# Altium PCB pcb.PcbDoc
Units mm, origin at the board's own origin, x right, y up, seen from the top; angles counter-clockwise.
Board outline 75.69 x 75.31 mm, 2 copper layers (Top Layer, Bottom Layer); 29 components, 27 nets, 126 pads, 10 vias.
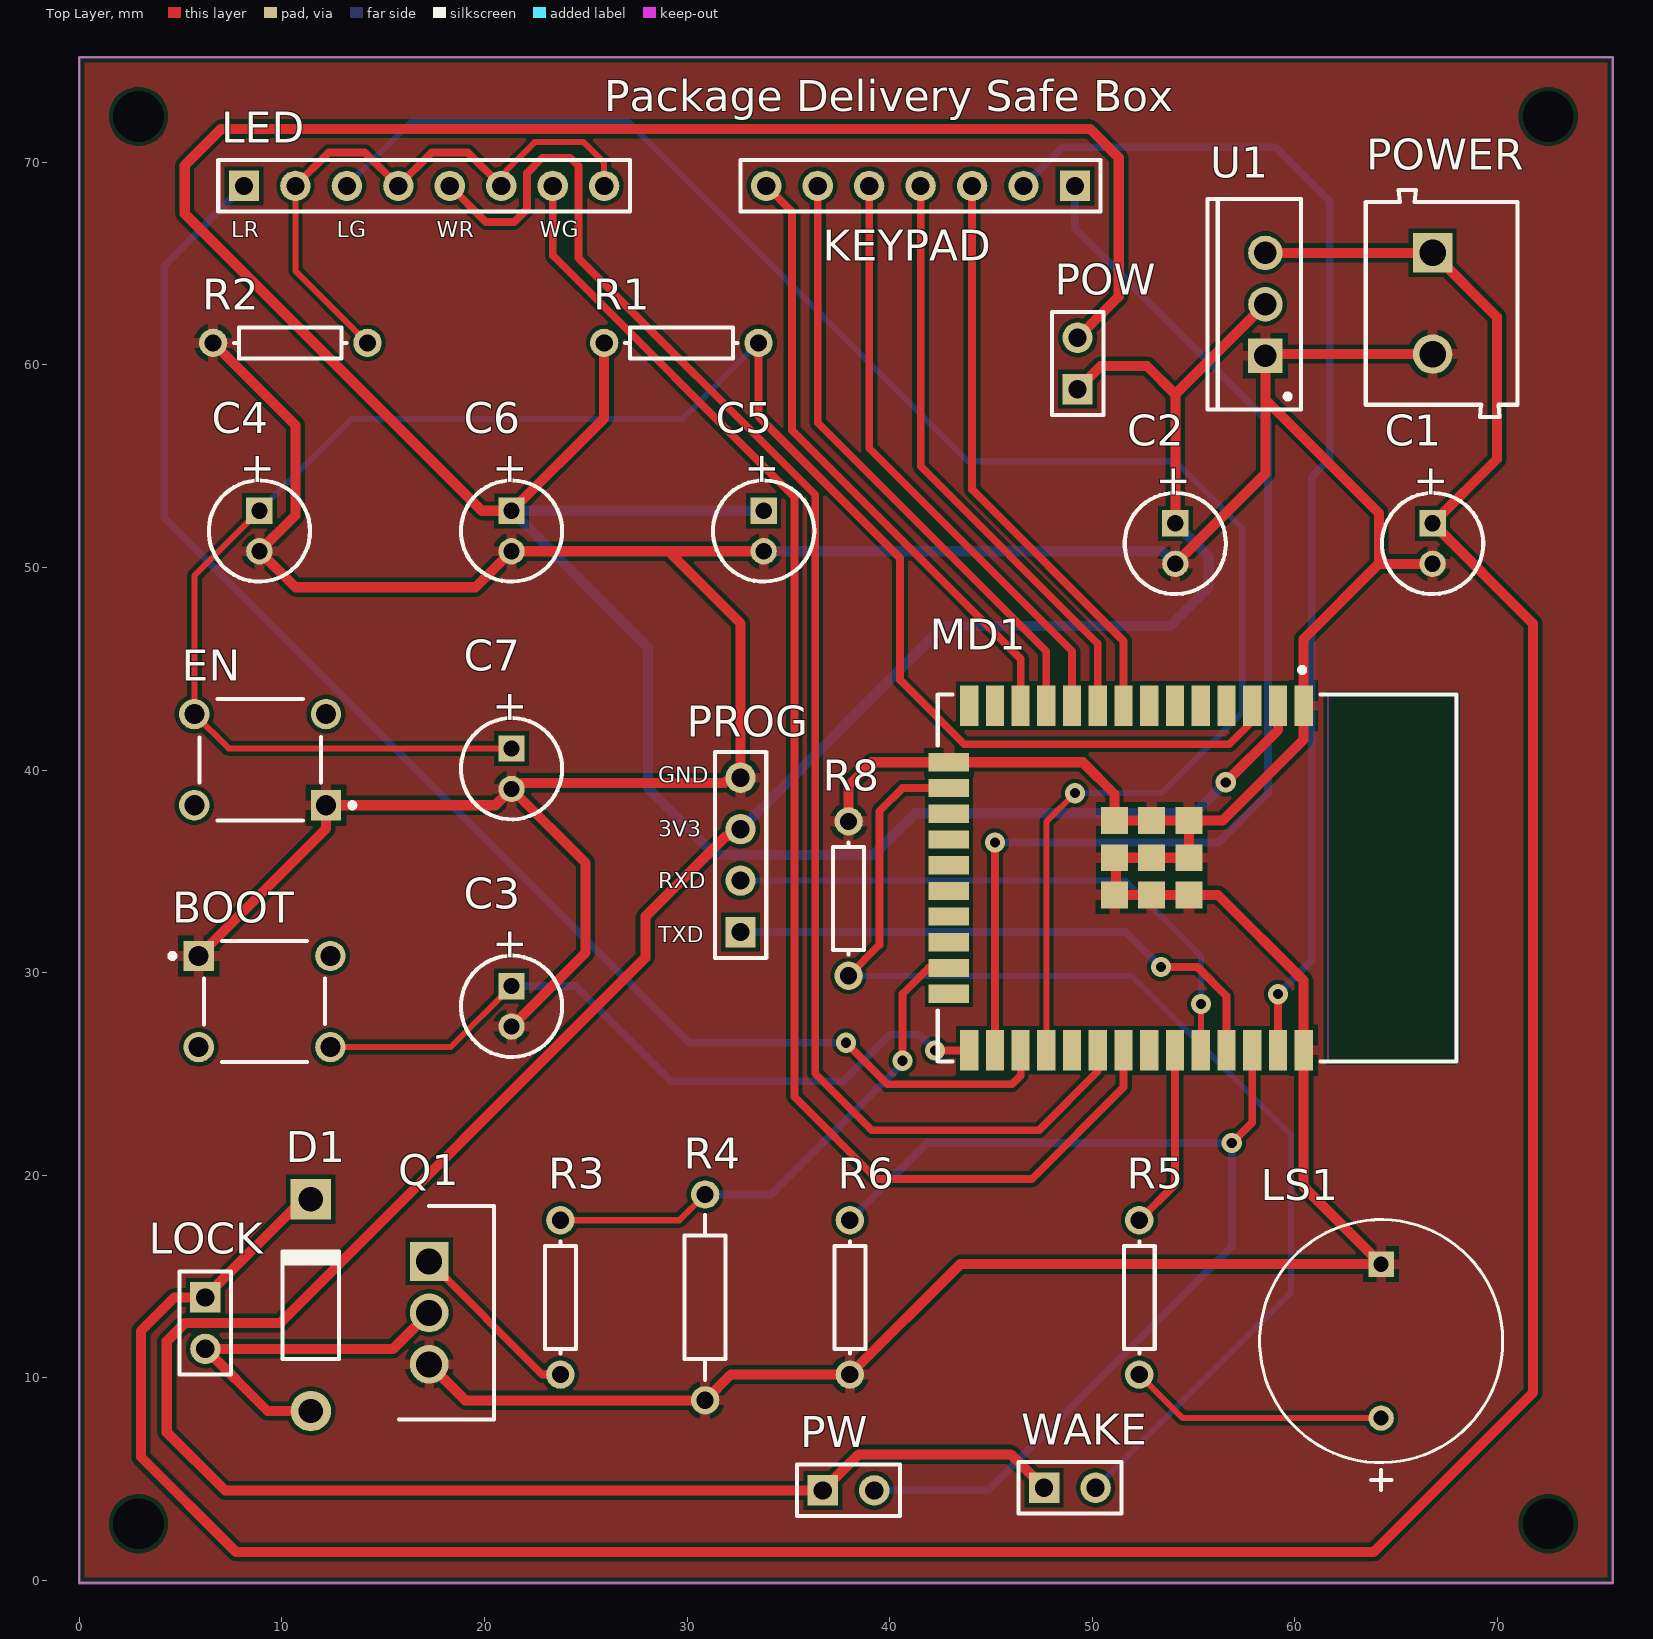
[diagram p0: Top Layer view]
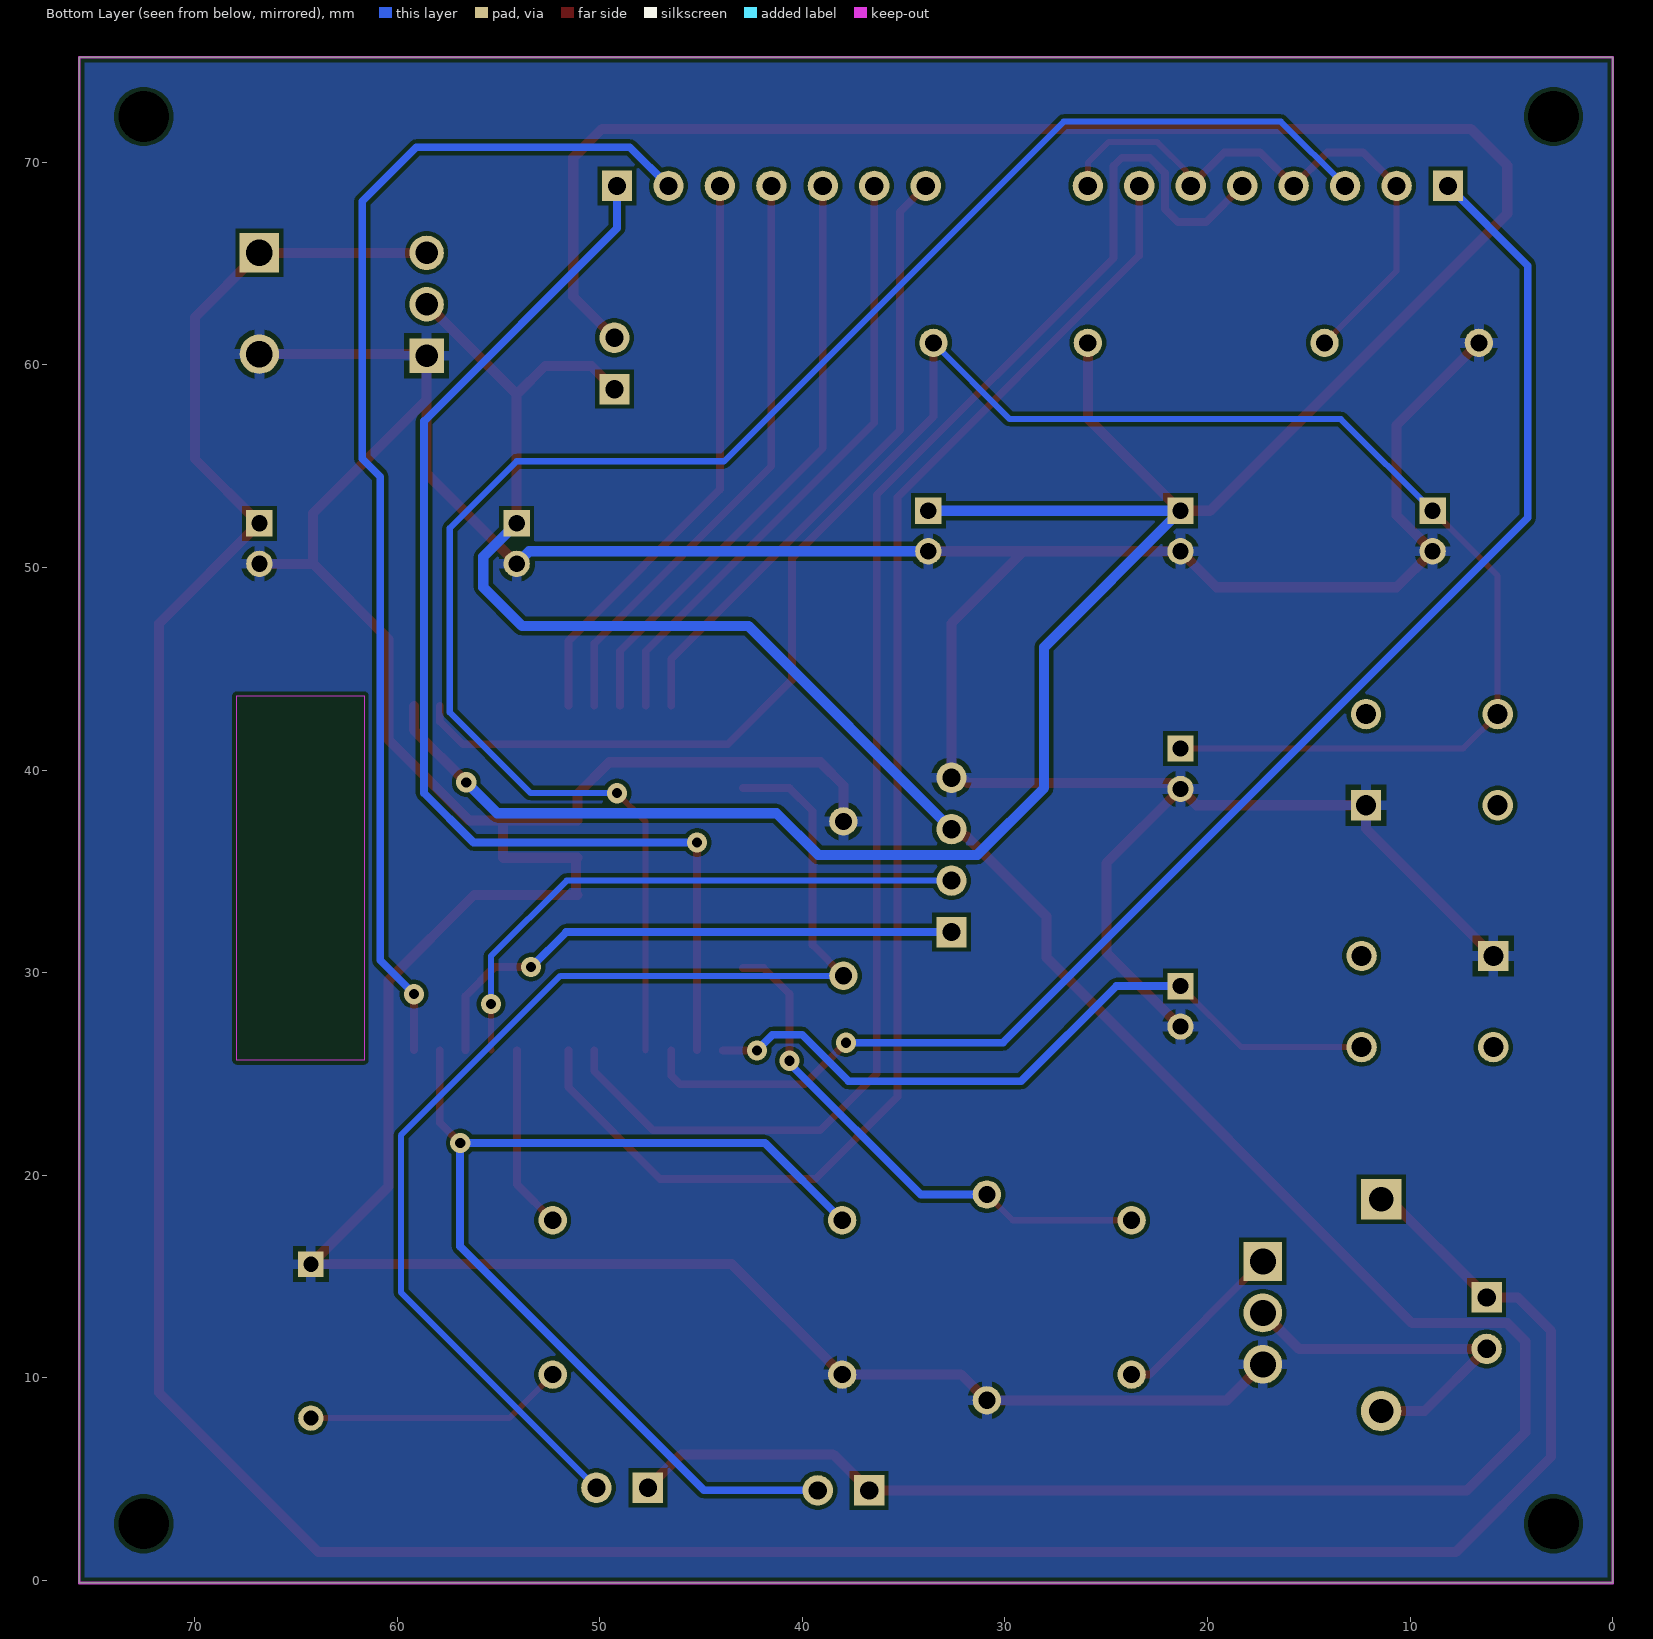
[diagram p1: Bottom Layer view, seen from below]

## Layer stack, top to bottom
Top Solder: solder mask 0.0102, Solder Resist, Dk 3.5
Top Layer: signal copper 0.0356
Dielectric 1: dielectric 0.32, FR-4, Dk 4.8
Bottom Layer: signal copper 0.0356
Bottom Solder: solder mask 0.0102, Solder Resist, Dk 3.5

## Board outline
0,-0.127 75.692,-0.127 75.692,75.184 0,75.184

## Design rules (kind name [scope] priority, off if disabled: settings)
BoardOutlineClearance [All] p1: gap=0.2 ignorepadtopadclearanceinfootprint=FALSE except(0.4: Arc-SplitBarrior Arc-SplitContinuation Track-SplitBarrior Track-SplitContinuation SMDPad-SplitBarrior SMDPad-SplitContinuation THPad-SplitBarrior THPad-SplitContinuation Via-SplitBarrior Via-SplitContinuation Fill-SplitBarrior Fill-SplitContinuation Poly-SplitBarrior Poly-SplitContinuation Region-SplitBarrior Region-SplitContinuation Text-SplitBarrior Text-SplitContinuation)
Clearance "Clearance Bottom Layer" [OnLayer('Bottom Layer')] p1: gap=0.203 ignorepadtopadclearanceinfootprint=TRUE except(0.254: Arc-Text Track-Text SMDPad-Text THPad-Text Via-Text Fill-Text Poly-Text Region-Text Text-Text)
Clearance "Clearance Top Layer" [OnLayer('Top Layer')] p2: gap=0.203 ignorepadtopadclearanceinfootprint=TRUE except(0.254: Arc-Text Track-Text SMDPad-Text THPad-Text Via-Text Fill-Text Poly-Text Region-Text Text-Text)
Clearance [All] p3: gap=0.3 ignorepadtopadclearanceinfootprint=FALSE
HoleSize [All] p1: absolutevalues=TRUE maxlimit=6.3 minlimit=0.2 maxpercent=80.000 minpercent=20.000
MinimumAnnularRing [All] p1: minimumring=0.076
MinimumSolderMaskSliver [All] p1: minsoldermaskwidth=0.1
PolygonConnect PolygonConnect_1 [All] p1: thpad.connectstyle=Relief thpad.reliefconductorwidth=0.508 thpad.reliefentries=4 thpad.polygonreliefangle="90 Angle" thpad.airgapwidth=0.254 smdpad.connectstyle=Relief smdpad.reliefconductorwidth=0.508 smdpad.reliefentries=4 smdpad.polygonreliefangle="90 Angle" smdpad.airgapwidth=0.254 via.connectstyle=Direct via.reliefconductorwidth=0.508 via.reliefentries=4 via.polygonreliefangle="90 Angle" via.airgapwidth=0.254
RoutingCorners [All] p1: cornerstyle=Round minsetback=2.54 maxsetback=2.54
RoutingVias [All] p1: holewidth=0.5 width=1 viastyle="Through Hole" minholewidth=0.2 minwidth=0.45 maxholewidth=1 maxwidth=2
SilkToSilkClearance [All] p1: silktosilkclearance=0.1
SilkToSolderMaskClearance [IsPad] p1: minsilkscreentomaskgap=0.1 clearancetoexposedcopper=TRUE
SolderMaskExpansion [All] p1: expansion=0.102 istentingtop=FALSE
Width [All] p1: maxlimit=2.54 minlimit=0.3 preferedwidth=0.381 minimp=50.000000 maximp=50.000000 favimp=50.000000
25 further rules are at their usual default settings.

## Components (designator, comment, footprint, x,y, rotation, side; value= is the part's Value field where it differs from the comment)
BOOT "1825910-6" TECO-1825910-6_V 9.144,28.575 r0 top
C1 "22uF" CAPPR55-200-1100X500X1200 66.802,51.181 r270 top
C2 "22uF" CAPPR55-200-1100X500X1200 54.102,51.181 r270 top
C3 "0.1uF" CAPPR55-200-1100X500X1200 21.336,28.337 r270 top
C4 "0.1uF" CAPPR55-200-1100X500X1200 8.89,51.8 r270 top
C5 "22uF" CAPPR55-200-1100X500X1200 33.782,51.8 r270 top
C6 "0.1uF" CAPPR55-200-1100X500X1200 21.336,51.8 r270 top
C7 "1uF" CAPPR55-200-1100X500X1200 21.336,40.069 r270 top
D1 "Diode 1N4002" DO-41 11.43,13.589 r90 top
EN "1825910-6" TECO-1825910-6_V 8.927,40.513 r180 top
KEYPAD "Keypad" HDR1X7 49.149,68.834 r180 top
LED "LEDs" HDR1X8 8.128,68.834 r0 top
LOCK "LOCK" HDR1X2 6.223,13.97 r270 top
LS1 "Buzzer" FP-MCKPX-G1203A-K4056-MFG 64.262,11.811 r270 top
MD1 "ESP32-WROOM-32D" FP-ESP32-WROOM-32D-MFG 55.176,34.671 r270 top
POW "Power enable" HDR1X2 49.276,58.801 r90 top
POWER "Power in" 691102710002 67.252,63.032 r270 top
PROG "FTDI" HDR1X4 32.639,32.004 r90 top
PW "PW reset button" HDR1X2 36.703,4.445 r0 top
Q1 "IRL520NPBF" TO254P469X1042X1967-3P 17.272,15.748 r270 top
R1 "" AXIAL-0.3 29.718,61.087 r180 top value=10k
R2 "330" AXIAL-0.3 10.414,61.087 r180 top
R3 "" AXIAL-0.3 23.749,13.97 r90 top value=220
R4 "Res2" AXIAL-0.4 30.893,13.97 r90 top value=100k
R5 "" AXIAL-0.3 52.324,13.97 r270 top value=220
R6 "" AXIAL-0.3 38.036,13.97 r270 top value=10k
R8 "" AXIAL-0.3 37.973,33.655 r90 top value=10k
U1 "LD1117V33C" TO220 58.547,62.992 r90 top
WAKE "Sleep wake up button" HDR1X2 47.625,4.572 r0 top

## Footprints (in the part's own frame and the unit in brackets; to place one, negate y for a bottom-side part, rotate by r counter-clockwise, add the part's x,y. Pads: shape width x height; smd on the part's side, far side on the other; paste and mask are expansions set on the pad)
691102710002 [mm] "5,00mm - modular - blue - Horizontal entry with pressure clamp - 9,9 mm height - 02p"
  rect 1.95x1.95 hole 1.3: 1(-2.5,-0.45)
  round 1.95 hole 1.3: 2(2.5,-0.45)
  silkscreen extent -5.6,-3.75 5.6,3.75, body extent -5.6,-3.75 5.6,3.75, height 9.96
AXIAL-0.3 [mm] "Axial Device, Thru-Hole; 2 Leads; 0.3 in Pin Spacing"
  round 1.4 hole 0.85: 1(-3.81,0) 2(3.81,0)
  silkscreen extent -2.77,-0.76 2.77,0.76
AXIAL-0.4 [mm] "Axial Device, Thru-Hole; 2 Leads; 0.4 in Pin Spacing"
  round 1.4 hole 0.85: 1(-5.08,0) 2(5.08,0)
  silkscreen extent -4.06,-1.02 4.06,1.02
CAPPR55-200-1100X500X1200 [mm] "THD, 2-Leads, Dia 5mm, Body Length 11mm"
  rect 1.3x1.3 hole 0.8: 1(-1,0)
  round 1.3 hole 0.8: 2(1,0)
  silkscreen extent -2.5,-2.5 2.5,2.5, body extent -2.5,-2.5 2.5,2.5, height 12
DO-41 [mm] "Diode, Axial; Body 5.2 x 2.7 mm (LxDia. max), Lead Dia. 0.86 mm (max)"
  round 2 hole 1.2: 1(-5.23,0)
  rect 2x2 hole 1.2: 2(5.23,0)
  silkscreen extent -2.65,-1.4 2.75,1.4
FP-ESP32-WROOM-32D-MFG [mm]
  rect 2x0.9 smd paste+0 mask+0: 1(-8.5,5.26) 2(-8.5,3.99) 3(-8.5,2.72) 4(-8.5,1.45) 5(-8.5,0.18) 6(-8.5,-1.09) 7(-8.5,-2.36) 8(-8.5,-3.63) 9(-8.5,-4.9) 10(-8.5,-6.17) 11(-8.5,-7.44) 12(-8.5,-8.71) 13(-8.5,-9.98) 14(-8.5,-11.25) 25(8.5,-11.25) 26(8.5,-9.98) 27(8.5,-8.71) 28(8.5,-7.44) 29(8.5,-6.17) 30(8.5,-4.9) 31(8.5,-3.63) 32(8.5,-2.36) 33(8.5,-1.09) 34(8.5,0.18) 35(8.5,1.45) 36(8.5,2.72) 37(8.5,3.99) 38(8.5,5.26)
  rect 0.9x2 smd paste+0 mask+0: 15(-5.715,-12.25) 16(-4.445,-12.25) 17(-3.175,-12.25) 18(-1.905,-12.25) 19(-0.635,-12.25) 20(0.635,-12.25) 21(1.905,-12.25) 22(3.175,-12.25) 23(4.445,-12.25) 24(5.715,-12.25)
  rect 1.33x1.33 smd paste+0 mask+0: 39(-2.835,-0.405) 39(-2.835,-2.24) 39(-2.835,-4.075) 39(-1,-0.405) 39(-1,-2.24) 39(-1,-4.075) 39(0.835,-0.405) 39(0.835,-2.24) 39(0.835,-4.075)
  Keep-Out Layer region: -9,6.45 9,6.45 9,12.75 -9,12.75
  Keep-Out Layer region: -9,6.45 9,6.45 9,12.75 -9,12.75
  silkscreen extent -10.4,-12.8 9.05,12.8, body extent -9.6,-13.35 9.6,12.9, height 0.25
FP-MCKPX-G1203A-K4056-MFG [mm]
  rect 1.25x1.25 hole 0.75 paste-1000 mask+0: 1(-3.8,0)
  round 1.25 hole 0.75 paste-1000 mask+0: 2(3.8,0)
  silkscreen extent -6,-6 7.35,6, body extent -6.1,-6.1 6.1,6.1, height 0.25
HDR1X2 [mm] "Connector; Header; 2 Position"
  rect 1.5x1.5 hole 0.9: 1(0,0)
  round 1.5 hole 0.9: 2(2.54,0)
  silkscreen extent -1.27,-1.27 3.81,1.27
HDR1X4 [mm] "Connector; Header; 4 Position"
  rect 1.5x1.5 hole 0.9: 1(0,0)
  round 1.5 hole 0.9: 2(2.54,0) 3(5.08,0) 4(7.62,0)
  silkscreen extent -1.27,-1.27 8.89,1.27
HDR1X7 [mm] "Connector; Header; 7 Position"
  rect 1.5x1.5 hole 0.9: 1(0,0)
  round 1.5 hole 0.9: 2(2.54,0) 3(5.08,0) 4(7.62,0) 5(10.16,0) 6(12.7,0) 7(15.24,0)
  silkscreen extent -1.27,-1.27 16.51,1.27
HDR1X8 [mm] "Connector; Header; 8 Position"
  rect 1.5x1.5 hole 0.9: 1(0,0)
  round 1.5 hole 0.9: 2(2.54,0) 3(5.08,0) 4(7.62,0) 5(10.16,0) 6(12.7,0) 7(15.24,0) 8(17.78,0)
  silkscreen extent -1.27,-1.27 19.05,1.27
TECO-1825910-6_V [mm] "Switch, 4-Leads, Body 5.99x5.99mm"
  rect 1.5x1.5 hole 0.99: 1(-3.25,2.25)
  round 1.5 hole 0.99: 2(3.25,2.25) 3(-3.25,-2.25) 4(3.25,-2.25)
  silkscreen extent -4.67,-3 3,3, body extent -3,-2.99 2.99,3, height 5
TO220 [mm] "TO, Thru-Hole, Vertical, Heatsink Mounted; 3 In-Line Leads; Pitch 2.54 mm"
  rect 1.7x1.7 hole 1.1: 1(-2.54,0)
  round 1.7 hole 1.1: 2(0,0) 3(2.54,0)
  silkscreen extent -5.2,-1.75 5.2,2.85, body extent -5.25,-1.8 5.25,2.9, height 19.7
TO254P469X1042X1967-3P [mm]
  rect 1.92x1.92 hole 1.28: 1(0,0)
  round 1.92 hole 1.28: 2(2.54,0) 3(5.08,0)
  silkscreen extent -2.73,-1.49 7.81,3.2, body extent -2.67,-1.5 7.75,3.19, height 18.84

## Part data
BOOT EN: library part CMP-1684-00021-1, "Tact Switch, SPST-NO, 0.05 A, -35 to 85 degC, 4-Pin THD, RoHS, Bulk", Actuator Color=Black, Contact Rating @ Voltage=0.05A@24VDC, Dielectric Strength=500VAC, Manufacturer="TE Connectivity", Maximum AC Voltage Rating=N/A, Maximum Contact Resistance=100mOhm, Maximum DC Voltage Rating=24V, Minimum Insulation Resistance=100MOhm, Operating Temperature=-35to85C, Package Description="4-Pin Through Hole Device, Body 5.99 x 5.99 mm, Pitch 6.5 mm", Package Reference=THD, Actuator Length=1.4mm, Actuator Material=PolybutyleneTerephthalate, Actuator Style=RoundButton, Base Material=N/A, Body Orientation=Straight, Bushing Type=Unthreaded, Contact Material=CopperAlloy, Contact Plating=Silver, Datasheet URL=http://www.te.com/commerce/DocumentDelivery/DDEController?Action=showdoc&DocId=Customer+Drawing%7F1825910%7FC9%7Fpdf%7FEnglish%7FENG_CD_1825910_C9.pdf%7F1825910-6, Datasheet Version="Rev. C9", Dimension=5.99x5mm, Electrical Life=100000Cycles, Family=1825910, Function=MomentaryContact, Housing Material=N/A, Illumination=N/R, Manufacturer URL=http://www.te.com, Mechanical Life=100000Cycles, Mounting=ThroughHole, Packaging=N/A, Part No=1825910-6, Pole Throw Configuration=SPST, Product Weight=N/A, RoHS=Yes, Seal Description=N/A, Seal Location=N/A, Switch Configuration=OFF(ON), Terminal Type=PCPins, Thread Size=N/R
C1 C2 C5: library part CMP-1665-00036-2, "Aluminum Electrolytic Capacitor, 22 uF, +/- 20%, 50 V, -40 to 85 degC, 2-Pin THD, RoHS, Bulk", Case/Package=Radial, Leakage Current=3uA, Manufacturer=Panasonic, Max Operating Temperature=85degC, Min Operating Temperature=-40degC, Package Description="2-Pin Radial Lead, Dia 5 mm, Height 12 mm", Package Quantity=200, Package Reference=CAPPR55-200-1100X500X1200, Ripple Current=100mA, Tolerance=20%, Voltage=50V, Capacitance=22uF, Datasheet URL=https://industrial.panasonic.com/cdbs/www-data/pdf/RDF0000/ABA0000C1218.pdf, Datasheet Version="Rev. 05, 10/2016", Diameter=5mm, Dissipation Factor=0.12%, Height=11mm, Height - Seated (Max)=0.472inch, Lead Diameter=0.5mm, Lead Pitch=2mm, Lead/Base Style=Straight, Length=11mm, Life (Hours)=2000Hour, Manufacturer URL=http://www.panasonic.com/, Mount=ThroughHole, Packaging=Bulk, Radiation Hardening=No, REACH SVHC=NoSVHC, Ripple Current (AC)=100mA, RoHSCompliant=true, Termination=Radial, Voltage Rating=50V, Voltage Rating (DC)=50V
C3 C4 C6 C7: library part CMP-1665-00036-2, "Aluminum Electrolytic Capacitor, 22 uF, +/- 20%, 50 V, -40 to 85 degC, 2-Pin THD, RoHS, Bulk", Capacitance=22uF, Case/Package=Radial, Leakage Current=3uA, Manufacturer=Panasonic, Max Operating Temperature=85degC, Min Operating Temperature=-40degC, Package Description="2-Pin Radial Lead, Dia 5 mm, Height 12 mm", Package Quantity=200, Package Reference=CAPPR55-200-1100X500X1200, Ripple Current=100mA, Tolerance=20%, Voltage=50V, Datasheet URL=https://industrial.panasonic.com/cdbs/www-data/pdf/RDF0000/ABA0000C1218.pdf, Datasheet Version="Rev. 05, 10/2016", Diameter=5mm, Dissipation Factor=0.12%, Height=11mm, Height - Seated (Max)=0.472inch, Lead Diameter=0.5mm, Lead Pitch=2mm, Lead/Base Style=Straight, Length=11mm, Life (Hours)=2000Hour, Manufacturer URL=http://www.panasonic.com/, Mount=ThroughHole, Packaging=Bulk, Radiation Hardening=No, REACH SVHC=NoSVHC, Ripple Current (AC)=100mA, RoHSCompliant=true, Termination=Radial, Voltage Rating=50V, Voltage Rating (DC)=50V
D1: "1 Amp General Purpose Rectifier", Code_JEDEC=DO-204-AL, ComponentLink1Description="Manufacturer Link", ComponentLink1URL=http://www.fairchildsemi.com/, ComponentLink2Description=Datasheet, ComponentLink2URL=http://www.fairchildsemi.com/ds/1N%2F1N4001.pdf, DatasheetVersion=1998, LatestRevisionDate=17-Jul-2002, LatestRevisionNote="Re-released for DXP Platform.", PackageDescription="Diode, Axial; Body 5.2 x 2.7 mm (LxDia. max), Lead Dia. 0.86 mm (max)", PackageReference=DO-41, PackageVersion=Aug-1999, Published=8-Jun-2000, Publisher="Altium Limited"
KEYPAD: library part "Header 7", "Header, 7-Pin", LatestRevisionDate=17-Jul-2002, LatestRevisionNote="Re-released for DXP Platform.", Publisher="Altium Limited"
LED: library part "Header 8", "Header, 8-Pin", LatestRevisionDate=17-Jul-2002, LatestRevisionNote="Re-released for DXP Platform.", Publisher="Altium Limited"
LOCK POW PW WAKE: library part "Header 2", "Header, 2-Pin", LatestRevisionDate=17-Jul-2002, LatestRevisionNote="Re-released for DXP Platform.", Publisher="Altium Limited"
LS1: library part CMP-12433-000001-1, "MAGNETIC BUZZER AND TRANSDUCER - More Details", Current=30mA, Frequency=2300Hz, Manufacturer="Multicomp Pro", Manufacturer Part Number=MCKPX-G1203A-K4056, Max Supply Voltage=5V, Min Supply Voltage=2V, Operating Supply Voltage=3V, Package=0, Temperature="-20°C to +70°C", Temperature Range High=+70°C, Temperature Range Low=-20°C, Automotive=No, Category=Speak, ComponentLink2Description=Datasheet, ComponentLink2URL=http://www.farnell.com/datasheets/1498149.pdf?_ga=2.17855225.1157923166.1572356775-536200964.1569240579, Device Class L1=Electromechanical, Device Class L2="Audio Products", Device Class L3=Buzzers, Height=9.5mm, Lead Free=Yes, Octopart=https://octopart.com/mckpx-g1203a-k4056-multicomp-12157154, RoHS=TRUE, Standoff Height=0.5mm
MD1: library part CMP-194065-000003-1, "WIFI MODULE 32MBITS SPI FLASH", Manufacturer="Espressif Systems", Max Frequency=2484MHz, Max Supply Voltage=3.6V, Min Supply Voltage=3V, Nominal Supply Current=500mA, Temperature="-40°C to +85°C", Temperature Range High=+85°C, Temperature Range Low=-40°C, Automotive=No, Bandwidth=72MHz, Category=UNK, ComponentLink2Description=Datasheet, ComponentLink2URL=https://www.espressif.com/sites/default/files/documentation/esp32-wroom-32d_esp32-wroom-32u_datasheet_en.pdf, Data Rate=150Mbits/s, Device Class L1="Integrated Circuits (ICs)", Device Class L2="RF Semiconductors and Devices", Device Class L3=Transceivers, Digikey Description="WIFI MODULE 32MBITS SPI FLASH", Height=3.2mm, Interface=I2C,SPI,UART,Ethernet,I2S,Other, Lead Free=Yes, Manufacturer Part Number=ESP32-WROOM-32D, Mouser Description="Wi-Fi/BT BLE Module ESP32-D0WD, SPI Flash, UART, P", Number Of Adc Channels=16, Number Of Gpio=32, Octopart=https://octopart.com/esp32-wroom-32d-espressif+systems-91040050, Package=ESP32-WROOM-32D, RoHS=TRUE, Sensitivity=-98dBm
POWER: library part CMP-1502-03258-1, "Series 102 - 5.00 mm Horizontal Entry Modular with Pressure Clamp WR-TBL, 2 pin", Manufacturer="Wurth Elektronik", Operating Temperature=-40to105degC, Package Reference=691102710002, Datasheet URL=http://katalog.we-online.de/em/datasheet/6911027100xx.pdf, Manufacturer URL=http://www.we-online.de, Mounting Technology=THT, Packaging=Box, Part Number=691102710002, Pin Number=2, Pitch=5.00mm, Publisher=WurthElektronik
PROG: library part "Header 4", "Header, 4-Pin", LatestRevisionDate=17-Jul-2002, LatestRevisionNote="Re-released for DXP Platform.", Publisher="Altium Limited"
Q1: "MOSFET (N-Channel)", Manufacturer_Name=Infineon, Mouser Part Number=942-IRL520NPBF, Arrow Part Number=IRL520NPBF, Arrow Price/Stock=https://www.arrow.com/en/products/irl520npbf/infineon-technologies-ag?region=nac, Datasheet Link=https://www.infineon.com/dgdl/irl520npbf.pdf?fileId=5546d462533600a40153565f9b62255b, Height=4.69mm, Manufacturer_Part_Number=IRL520NPBF, Mouser Price/Stock=https://www.mouser.co.uk/ProductDetail/Infineon-Technologies/IRL520NPBF?qs=9%252BKlkBgLFf3eZ5ppEpIaKQ%3D%3D
R1 R2 R3 R5 R6 R8: library part Res1, "Resistor", LatestRevisionDate=17-Jul-2002, LatestRevisionNote="Re-released for DXP Platform.", PackageDescription="Axial Device, Thru-Hole; 2 Leads; 0.3 in Pin Spacing", PackageReference=AXIAL-0.3, Published=8-Jun-2000, Publisher="Altium Limited"
R4: "Resistor", LatestRevisionDate=17-Jul-2002, LatestRevisionNote="Re-released for DXP Platform.", PackageDescription="Axial Device, Thru-Hole; 2 Leads; 0.4 in Pin Spacing", PackageReference=AXIAL-0.4, Published=8-Jun-2000, Publisher="Altium Limited"
U1: library part CMP-0244-00471-1, "Fixed Low Drop Positive Voltage Regulator, 3.3V, 3-Pin TO-220", ComponentLink1Description="Manufacturer URL", ComponentLink1URL=http://www.st.com, ComponentLink2Description=Datasheet, ComponentLink2URL=http://www.st.com/internet/com/TECHNICAL_RESOURCES/TECHNICAL_LITERATURE/DATASHEET/CD00000544.pdf, ComponentLink3Description="Package Specification", ComponentLink3URL=http://www.st.com/internet/com/TECHNICAL_RESOURCES/TECHNICAL_LITERATURE/PACKAGE_INFORMATION/CD00004649.pdf, DatasheetVersion=1/11/2011, PackageDescription="TO, Thru-Hole, Vertical, Heatsink Mounted; 3 In-Line Leads; Pitch 2.54 mm", PackageReference=TO220, PackageVersion=ver3.0

## Free pads (board coordinates)
  round 0 hole 2.5: 2(2.921,72.263) 3(72.517,72.263) 4(72.517,2.794) 5(2.921,2.794)

## Via types
v1: diameter 1, hole 0.5, Top Layer to Bottom Layer, 10 vias

## Nets (pads, with @x,y where several pads share a name; then routed paths per layer and width w, separated by ;. In a path a pad name is that pad's centre, name@x,y a point inside that pad or via, vN(x,y) a via of type N, cw(c..) or ccw(c..) an arc to the next point about the centre after c; other vN are vias at no path point)
3V3: C2.1 POW.1 PROG.3 PW.1 U1.2 WAKE.1 | length 140.8
  Top Layer w0.5: PROG.3 32.368,37.084 31.998,36.714 31.888,36.714 27.94,32.766 27.94,30.734 9.906,12.7 5.207,12.7 4.318,11.811 4.318,7.315 7.188,4.445 PW.1 38.481,6.223 45.974,6.223 WAKE.1 ; POW.1 50.419,59.944 52.705,59.944 54.102,58.547 ; C2.1 54.102,53.975 54.102,58.547 ; U1.2 54.102,58.547
  Bottom Layer w0.5: PROG.3 42.672,47.117 53.848,47.117 55.753,49.022 55.753,50.53 C2.1
BOOT: BOOT.4 C3.1 MD1.25 | length 36
  Top Layer w0.3: BOOT.4 18.324,26.325 C3.1
  Top Layer w0.381: v1(42.24,26.162) 43.926,26.162 MD1.25
  Bottom Layer w0.381: C3.1 24.511,29.337 29.21,24.638 37.719,24.638 40.01,26.929 41.473,26.929 v1(42.24,26.162)
BUZZER: MD1.33 R5.1 | length 9.1
  Top Layer w0.381: R5.1 54.086,19.542 MD1.33
C1: KEYPAD.5 MD1.10 | length 29.8
  Top Layer w0.381: KEYPAD.5 38.989,55.88 49.006,45.863 MD1.10
C2: KEYPAD.6 MD1.11 | length 30.3
  Top Layer w0.381: KEYPAD.6 36.449,57.15 47.736,45.863 MD1.11
C3: KEYPAD.7 MD1.12 | length 30.9
  Top Layer w0.381: KEYPAD.7 35.179,67.564 35.179,56.769 46.466,45.482 MD1.12
EN: C4.1 C7.1 EN.4 MD1.3 R1.1 | length 95.3
  Top Layer w0.3: C4.1 5.677,49.587 EN.4 7.371,41.068 C7.1
  Top Layer w0.381: R1.1 33.528,57.455 40.513,50.47 40.513,44.45 43.688,41.275 56.769,41.275 57.896,42.402 MD1.3
  Bottom Layer w0.3: C4.1 13.418,57.328 29.769,57.328 R1.1
GND: BOOT.1 C1.2 C2.2 C3.2 C4.2 C5.2 C6.2 C7.2 EN.1 LS1.1 MD1.1 MD1.15 MD1.38 MD1.39 POWER.2 PROG.4 Q1.3 R2.2 R4.1 R6.2 R8.2 U1.1 | length 274.7
  Top Layer w0.5: BOOT.1 12.177,37.108 EN.1 20.531,38.263 C7.2 ; R2.2 10.668,57.023 10.668,52.578 C4.2 10.668,49.022 19.558,49.022 C6.2 29.083,50.8 ; Q1.3 19.05,8.89 R4.1 32.163,10.16 R6.2 43.487,15.611 LS1.1 60.436,19.437 MD1.38 60.436,29.607 56.207,33.836 54.771,33.836 52.936,33.836 51.101,33.836 51.181,33.916 51.181,35.591 51.101,35.671 52.936,35.671 54.771,35.671 MD1.39@54.771,37.506 ; C3.2 24.994,30.995 24.994,35.411 C7.2 ; C5.2 29.083,50.8 ; R8.2 37.973,39.243 39.116,40.386 MD1.15 49.53,40.386 51.101,38.815 51.101,37.506 52.936,37.506 MD1.39@54.771,37.506 ; C2.2 58.547,54.626 58.547,58.293 ; C1.2 64.151,50.181 ; POWER.2 58.627,60.532 U1.1 58.547,58.293 ; C7.2 21.552,39.069 21.854,39.37 31.846,39.37 31.909,39.433 32.448,39.433 PROG.4 32.639,47.244 29.083,50.8 ; MD1.39@54.771,37.506 56.429,37.506 60.436,41.513 MD1.1 60.436,46.466 64.151,50.181 ; 58.547,58.293 64.151,52.689 64.151,50.181
  Bottom Layer w0.5: C5.2 53.483,50.8 C2.2
LOCK_CTRL: MD1.23 R3.2 R4.2 | length 26.3
  Top Layer w0.3: R3.2 29.623,17.78 R4.2
  Top Layer w0.381: v1(40.64,25.654) 40.64,28.956 41.91,30.226 MD1.23
  Bottom Layer w0.381: R4.2 34.163,19.05 40.64,25.527 v1(40.64,25.654)
LOCK_G: LED.3 MD1.28 | length 86.1
  Top Layer w0.3: MD1.28 47.736,37.449 v1(49.149,38.862)
  Bottom Layer w0.3: LED.3 16.383,72.009 27.102,72.009 43.866,55.245 54.102,55.245 57.404,51.943 57.404,42.85 53.416,38.862 v1(49.149,38.862)
LOCK_R: LED.1 MD1.27 | length 73.3
  Top Layer w0.381: v1(37.846,26.543) 39.894,24.495 46.038,24.495 46.466,24.923 MD1.27
  Bottom Layer w0.381: LED.1 4.191,64.897 4.191,52.451 30.099,26.543 v1(37.846,26.543)
NetC5_1: C5.1 C6.1 MD1.2 POW.2 R1.2 | length 157.1
  Top Layer w0.5: R1.2 25.908,57.372 C6.1 19.869,52.8 5.207,67.462 5.207,69.85 7.01,71.653 49.886,71.653 51.308,70.231 51.308,63.373 POW.2 ; v1(56.591,39.395) 59.166,41.97 MD1.2
  Bottom Layer w0.5: C5.1 C6.1 28.067,46.069 28.067,39.116 31.369,35.814 39.218,35.814 41.275,37.871 55.067,37.871 v1(56.591,39.395)
NetD1_1: D1.1 LOCK.2 Q1.2 | length 18.3
  Top Layer w0.5: D1.1 9.294,8.359 LOCK.2 15.494,11.43 Q1.2
NetLED_2: LED.2 LED.4 LED.6 LED.8 R2.1 | length 30
  Top Layer w0.3: LED.2 10.668,64.643 R2.1 ; LED.6 21.058,69.064 21.058,69.572 22.479,70.993 24.892,70.993 25.908,69.977 LED.8
  Top Layer w0.381: LED.2 12.319,70.485 14.097,70.485 LED.4 17.399,70.485 19.177,70.485 LED.6
NetLS1_2: LS1.2 R5.2 | length 12.8
  Top Layer w0.3: R5.2 54.473,8.011 LS1.2
NetQ1_1: Q1.1 R3.1 | length 8.8
  Top Layer w0.381: Q1.1 22.86,10.16 R3.1
R1: KEYPAD.1 MD1.26 | length 58.7
  Top Layer w0.381: MD1.26 v1(45.196,36.424)
  Bottom Layer w0.381: v1(45.196,36.424) 56.236,36.424 58.674,38.862 58.674,57.226 49.149,66.751 KEYPAD.1
R2: KEYPAD.2 MD1.37 | length 60
  Top Layer w0.381: MD1.37 v1(59.166,28.94)
  Bottom Layer w0.381: KEYPAD.2 48.514,70.739 59.055,70.739 61.722,68.072 61.722,55.372 60.833,54.483 60.833,30.607 v1(59.166,28.94)
R3: KEYPAD.3 MD1.8 | length 28.8
  Top Layer w0.381: KEYPAD.3 44.069,53.848 51.546,46.371 MD1.8
R4: KEYPAD.4 MD1.9 | length 29.3
  Top Layer w0.381: KEYPAD.4 41.529,54.991 50.276,46.244 MD1.9
RESET_PW: MD1.36 PW.2 R6.1 | length 53.2
  Top Layer w0.381: v1@56.896,21.578 v1(56.884,21.59) 57.896,22.602 MD1.36
  Bottom Layer w0.381: R6.1 41.846,21.59 v1(56.884,21.59) ; PW.2 44.856,4.445 56.896,16.485 v1@56.896,21.578
RXD: MD1.34 PROG.2 | length 28.9
  Top Layer w0.3: MD1.34 55.372,26.187 v1(55.372,28.448)
  Bottom Layer w0.3: PROG.2 51.638,34.544 55.372,30.81 v1(55.372,28.448)
TXD: MD1.35 PROG.1 | length 28
  Top Layer w0.381: v1(53.391,30.277) 55.194,30.277 56.626,28.845 MD1.35
  Bottom Layer w0.381: PROG.1 51.664,32.004 v1(53.391,30.277)
VIN: C1.1 D1.2 LOCK.1 POWER.1 U1.3 | length 160.4
  Top Layer w0.5: D1.2 11.047,18.819 6.223,13.995 LOCK.1 4.699,13.97 3.048,12.319 3.048,6.096 7.747,1.397 63.881,1.397 71.755,9.271 71.755,47.228 C1.1 69.977,55.356 69.977,62.357 POWER.1 U1.3
WAKEUP: MD1.16 R8.1 WAKE.2 | length 59.2
  Top Layer w0.381: R8.1 39.497,31.369 39.497,37.973 40.64,39.116 MD1.16
  Bottom Layer w0.3: R8.1 51.943,29.845 59.817,21.971 59.817,14.224 WAKE.2
WIFI_G: LED.7 MD1.31 | length 71.5
  Top Layer w0.381: LED.7 23.368,65.405 35.306,53.467 35.306,23.876 39.37,19.812 47.018,19.812 51.546,24.34 MD1.31
WIFI_R: LED.5 MD1.30 | length 76.6
  Top Layer w0.381: LED.5 20.066,67.056 21.463,67.056 22.098,67.691 22.098,69.469 22.86,70.231 24.235,70.231 24.638,69.828 24.638,65.278 36.322,53.594 36.322,25.019 39.116,22.225 47.371,22.225 50.276,25.13 MD1.30
pads on no net: BOOT.2 BOOT.3 EN.2 EN.3 MD1.4 MD1.5 MD1.6 MD1.7 MD1.13 MD1.14 MD1.17 MD1.18 MD1.19 MD1.20 MD1.21 MD1.22 MD1.24 MD1.29 MD1.32

## Polygon pours and split planes (outlines as drawn)
GND on Bottom Layer "GND_L02_P001" (solid, pour order 1): 0.254,75.057 0.635,75.438 75.565,75.438 75.565,0.254 76.073,-0.254 -0.381,-0.254
GND on Top Layer "GND_L01_P000" (solid, pour order 0): 0.127,74.93 0.508,75.311 75.565,75.311 75.565,0.254 75.692,0.127 -0.762,0.127

## Keep-outs
Keep-Out Layer:
  lines w0.127: 0,-0.127 0,75.184 ; 0,-0.127 75.692,-0.127 75.692,75.184 ; 0,-0.127 0,75.184 ; 0,75.184 75.692,75.184 ; 0,75.184 75.692,75.184

## Silkscreen, mask and mechanical layers (free items; w line width, h text height)
Top Overlay:
  text "Package Delivery Safe Box" at 25.908,72.517 h1.52
  text "LR" at 7.493,66.294 h0.8
  text "LG" at 12.7,66.294 h0.8
  text "WR" at 17.653,66.294 h0.8
  text "WG" at 22.733,66.294 h0.8
  text "GND" at 28.575,39.37 h0.8
  text "3V3" at 28.575,36.703 h0.8
  text "RXD" at 28.575,34.163 h0.8
  text "TXD" at 28.575,31.496 h0.8

## Text inside footprints (layer, text, board x,y; h text height)
C1: Top Overlay "+" at 66.065,55.089 h1.5 r270
C2: Top Overlay "+" at 53.365,55.089 h1.5 r270
C3: Top Overlay "+" at 20.599,32.245 h1.5 r270
C4: Top Overlay "+" at 8.153,55.708 h1.5 r270
C5: Top Overlay "+" at 33.045,55.708 h1.5 r270
C6: Top Overlay "+" at 20.599,55.708 h1.5 r270
C7: Top Overlay "+" at 20.599,43.977 h1.5 r270